# EAGLE board x (EAGLE 7.6.0)
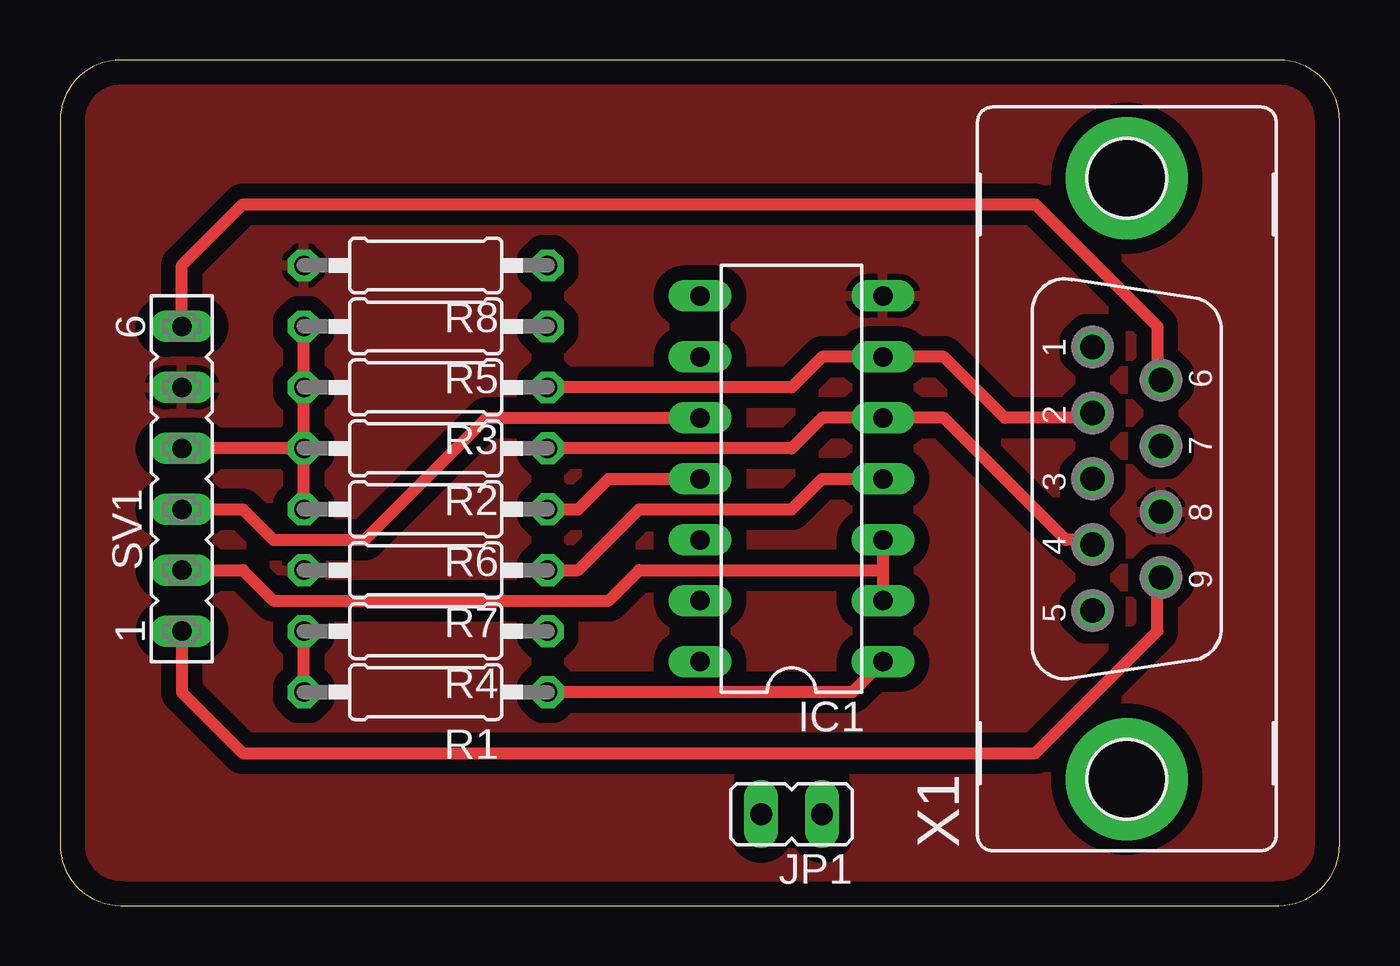
[diagram p0: board, top side]
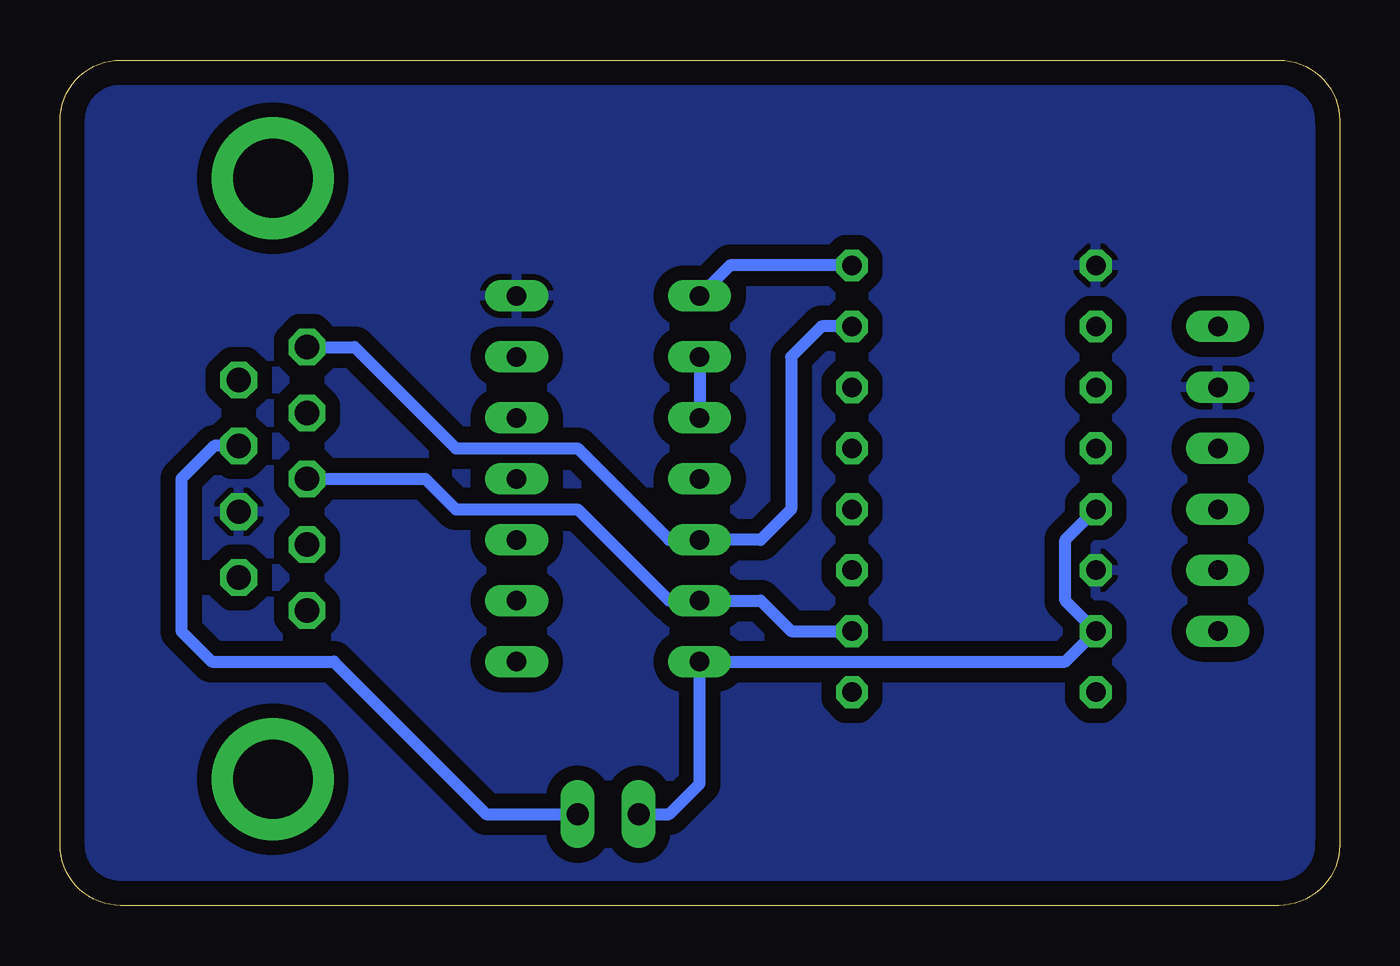
[diagram p1: board, bottom side, seen from below]

Size 53.32 x 35.23 mm. Coordinates in mm from the lower left corner, seen from the top.
Outline: 0,32.69 0,2.54 arc90 2.54,0 50.78,0 arc90 53.32,2.54 53.32,32.69 arc90 50.78,35.23 2.54,35.23 arc90 0,32.69
Copper layers (1*16): Top 0.035mm / dielectric 1.5mm / Bottom 0.035mm
Design rules "default": minimum track width 10mil, minimum drill 24mil, track to track 8mil, track to pad 8mil, pad to pad 8mil, via to via 8mil, smd to smd 8mil, copper to edge 40mil, drill to drill 8mil, minimum pad ring 10mil, minimum via ring 8mil, stop-mask expansion 4mil, vias tented up to drill 0mil, thermal gap 10mil

## Footprints (pad centres in the part's own frame; a part is rotated, then mirrored left to right if it is on the bottom)
DIL14 = drill 0.813 long: 1 -7.62,-3.81; 2 -5.08,-3.81; 3 -2.54,-3.81; 4 0,-3.81; 5 2.54,-3.81; 6 5.08,-3.81; 7 7.62,-3.81; 8 7.62,3.81; 9 5.08,3.81; 10 2.54,3.81; 11 0,3.81; 12 -2.54,3.81; 13 -5.08,3.81; 14 -7.62,3.81
JP1 = drill 0.914 long: 1 0,-1.27; 2 0,1.27
0207/10 = drill 0.813 octagon: 1 -5.08,0; 2 5.08,0
FE06 = drill 0.813 long: 1 -6.35,0; 2 -3.81,0; 3 -1.27,0; 4 1.27,0; 5 3.81,0; 6 6.35,0
F09VP = drill 1.016 octagon: 1 5.486,1.422; 2 2.743,1.422; 3 0,1.422; 4 -2.743,1.422; 5 -5.486,1.422; 6 4.115,-1.422; 7 1.372,-1.422; 8 -1.372,-1.422; 9 -4.115,-1.422 | drill 3.302 pad 5.08: G1 -12.522,0; G2 12.522,0

## Placement (x,y rotation side)
IC1  4066N  [DIL14]  30.48,17.78 90 top
JP1  [JP1]  30.48,3.81 90 top
R1  [0207/10]  15.24,8.89 180 top
R2  [0207/10]  15.24,19.05 180 top
R3  [0207/10]  15.24,21.59 180 top
R4  [0207/10]  15.24,11.43 180 top
R5  [0207/10]  15.24,24.13 180 top
R6  [0207/10]  15.24,16.51 180 top
R7  [0207/10]  15.24,13.97 180 top
R8  [0207/10]  15.24,26.67 180 top
SV1  [FE06]  5.08,17.78 90 top
X1  [F09VP]  44.45,17.78 90 top

## Library data of the parts
IC1 = 40xx
JP1 = jumper
R1-R8 = rcl
SV1 = con-lsta; OC_FARNELL: unknown; OC_NEWARK: unknown
X1 = con-subd; OC_FARNELL: unknown; OC_NEWARK: unknown

## Nets
DN: IC1.6 R3.1 X1.2
FIRE: SV1.6 X1.6
FIRE2: SV1.1 X1.9
GND: IC1.7 R7.2 R8.2 SV1.5 X1.8
LT: IC1.13 R4.1 X1.3
N$1: JP1.1 X1.7
N$3: IC1.1 R1.1
N$8: IC1.11 R6.1
N$9: IC1.4 R7.1
N$10: IC1.8 R8.1
RT: IC1.5 R2.1 X1.4
UP: IC1.12 R5.1 X1.1
VCC: IC1.14 JP1.2 R1.2 R2.2 R3.2 R4.2 R5.2 R6.2 SV1.4
X: IC1.2 IC1.3 SV1.2
Y: IC1.9 IC1.10 SV1.3

## Tracks (layer width: path | path; a pad name or v marks a point on that pad's centre or on a via)
DN
  Top 0.508: X1.2 43.03,20.47 43.18,20.32 39.37,20.32 36.83,22.86 IC1.6 31.75,22.86 30.48,21.59 R3.1
FIRE
  Top 0.508: SV1.6 5.08,26.67 7.62,29.21 40.64,29.21 45.72,24.13 45.72,22.05 X1.6
FIRE2
  Top 0.508: SV1.1 5.08,8.89 7.62,6.35 40.64,6.35 45.72,11.43 45.72,13.51 X1.9
GND
  pour Bottom (isolate 0.61): 50.8,0 2.54,0 arc-90 0,2.54 0,33.02 arc-90 2.54,35.56 50.8,35.56 arc-90 53.34,33.02 53.34,2.54 arc-90
  pour Top (isolate 0.61): 50.8,0 2.54,0 arc-90 0,2.54 0,33.02 arc-90 2.54,35.56 50.8,35.56 arc-90 53.34,33.02 53.34,2.54 arc-90
LT
  Bottom 0.508: 43.18,17.78 X1.3 38.1,17.78 36.83,16.51 31.75,16.51 27.94,12.7 IC1.13 24.13,12.7 22.86,11.43 R4.1
N$1
  Bottom 0.508: X1.7 46.89,19.15 48.26,17.78 48.26,11.43 46.99,10.16 41.91,10.16 35.56,3.81 JP1.1
N$3
  Top 0.508: IC1.1 33.02,8.89 R1.1
N$8
  Top 0.508: R6.1 21.59,16.51 22.86,17.78 IC1.11
N$9
  Top 0.508: R7.1 21.59,13.97 24.13,16.51 30.48,16.51 31.75,17.78 IC1.4
N$10
  Bottom 0.508: R8.1 25.4,26.67 IC1.8
RT
  Top 0.508: X1.4 43.03,15.09 43.18,15.24 41.91,15.24 36.83,20.32 IC1.5 31.75,20.32 30.48,19.05 R2.1
UP
  Bottom 0.508: X1.1 41.05,23.27 36.83,19.05 31.75,19.05 27.94,15.24 IC1.12 24.13,15.24 22.86,16.51 22.86,22.86 21.59,24.13 R5.1
VCC
  Top 0.508: R1.2 R4.2 | R6.2 R2.2 | R2.2 SV1.4 | R2.2 R3.2 R5.2
  Bottom 0.508: R6.2 11.43,15.24 11.43,12.7 R4.2 11.43,10.16 IC1.14 26.67,5.08 27.94,3.81 JP1.2
X
  Top 0.508: IC1.3 34.29,13.97 | 34.29,13.97 IC1.2 | SV1.2 7.62,13.97 8.89,12.7 22.86,12.7 24.13,13.97 34.29,13.97
Y
  Top 0.508: SV1.3 7.62,16.51 8.89,15.24 12.7,15.24 17.78,20.32 IC1.10
  Bottom 0.508: IC1.9 IC1.10